# Altium PCB PCB_RX.PcbDoc
Units mm, origin at the board's own origin, x right, y up, seen from the top; angles counter-clockwise.
Board outline 85 x 54.6 mm, 2 copper layers (Top Layer, Bottom Layer); 89 components, 48 nets, 283 pads, 69 vias.
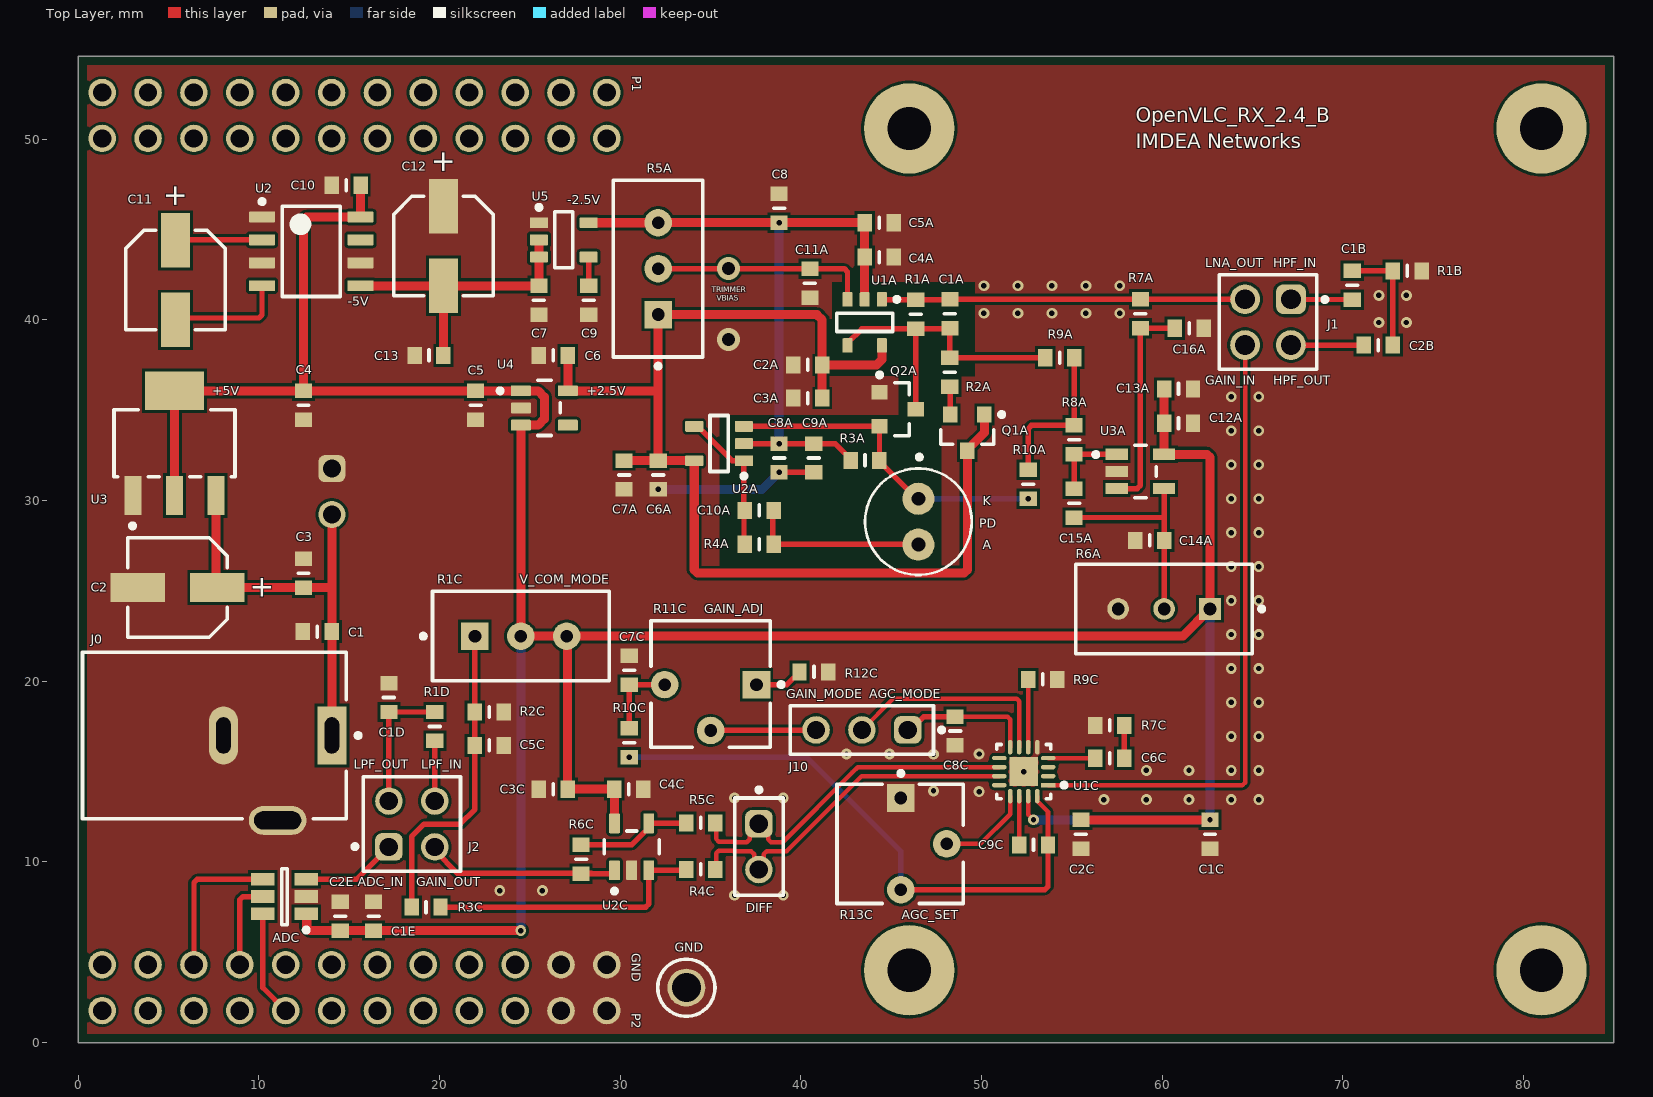
[diagram p0: Top Layer view]
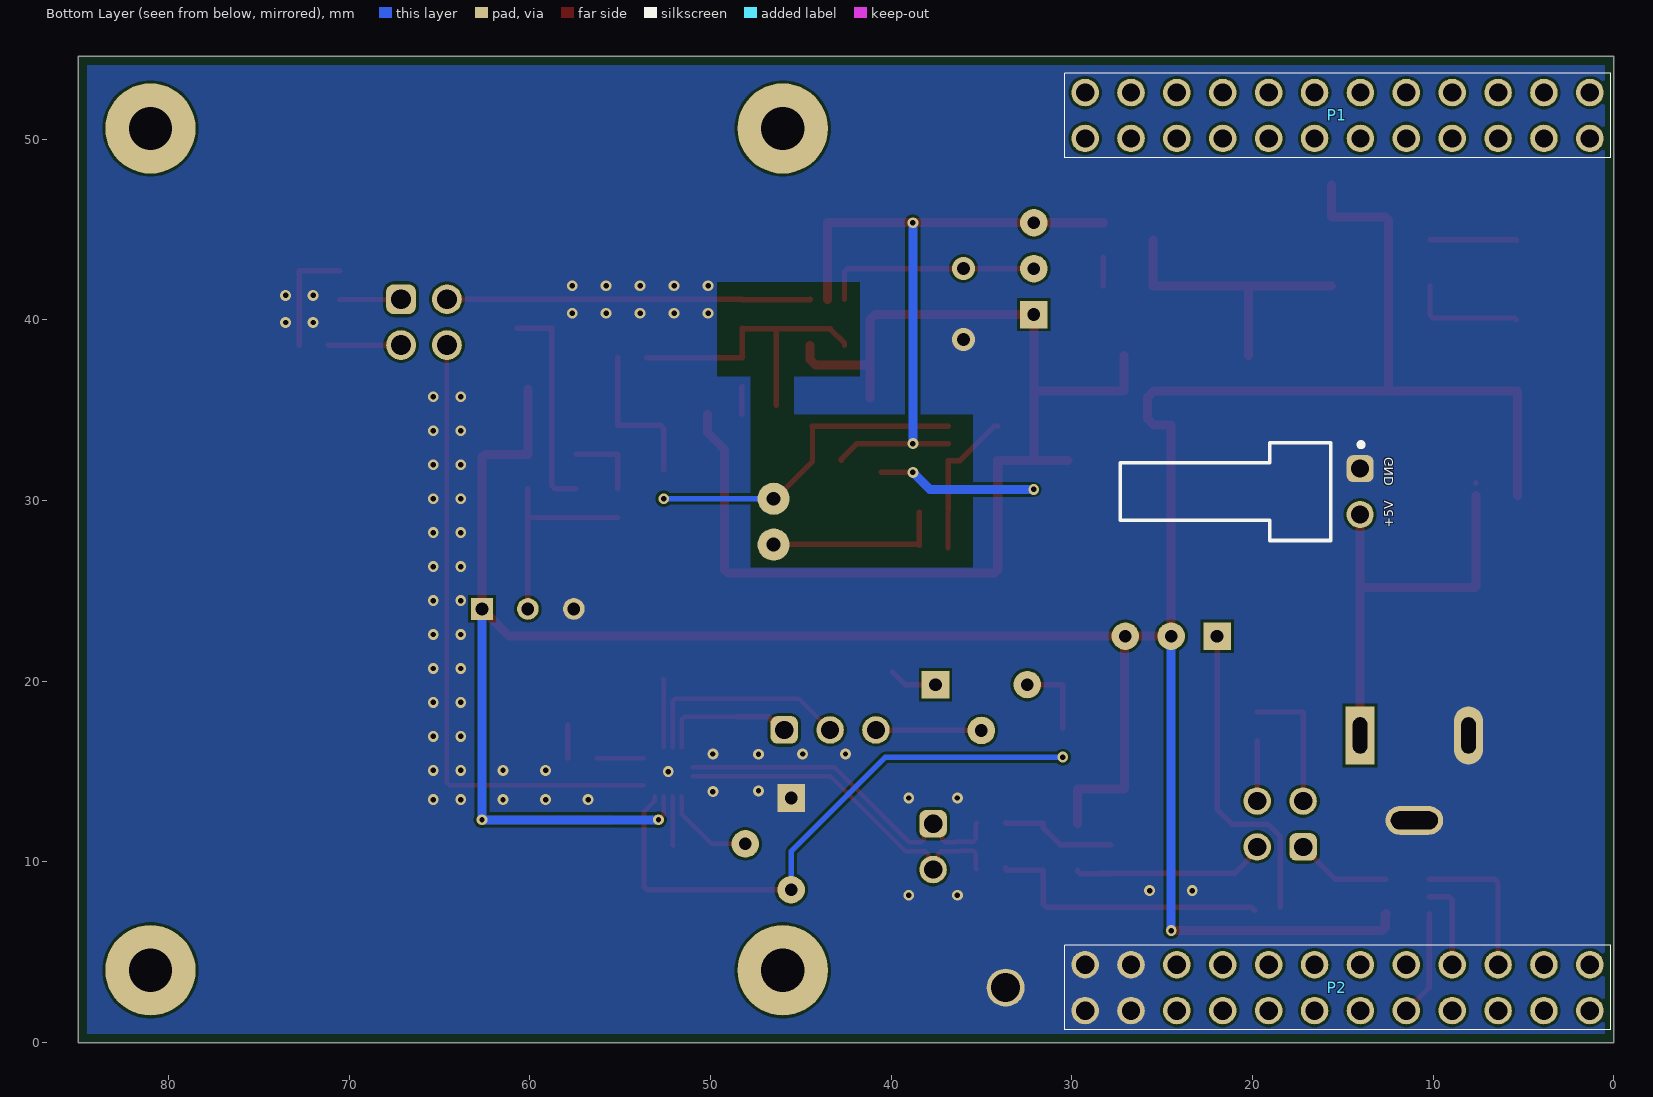
[diagram p1: Bottom Layer view, seen from below]

## Layer stack, top to bottom
Top Solder: solder mask 0.0102, Solder Resist, Dk 3.5
Top Layer: signal copper 0.0356
Dielectric1: dielectric 0.32, FR-4, Dk 4.8
Bottom Layer: signal copper 0.0356
Bottom Solder: solder mask 0.0102, Solder Resist, Dk 3.5

## Board outline
0,0 85,0 85,54.6 0,54.6

## Design rules (kind name [scope] priority, off if disabled: settings)
Clearance Clearance_1 [(InNet('GND') AND InComponent('DC-DC'))] p1: gap=0.5 ignorepadtopadclearanceinfootprint=FALSE except(0: Arc-Hole Track-Hole SMDPad-Hole THPad-Hole Via-Hole Fill-Hole Poly-Hole Region-Hole Text-Hole)
Clearance [All] p2: gap=0.15 ignorepadtopadclearanceinfootprint=FALSE except(0: Arc-Hole Track-Hole SMDPad-Hole THPad-Hole Via-Hole Fill-Hole Poly-Hole Region-Hole Text-Hole)
DiffPairsRouting [All] p1: maxlimit=0.3 minlimit=0.25 mostfreqgap=0.3 toplayer_prefgap=0.25 toplayer_minwidth=0.15 toplayer_maxwidth=0.381 toplayer_prefwidth=0.381 bottomlayer_minwidth=0.15 bottomlayer_maxwidth=0.381 bottomlayer_prefwidth=0.381 maxuncoupledlength=12.7
HoleSize [All] p1: absolutevalues=TRUE maxlimit=2.54 minlimit=0.25 maxpercent=80.000 minpercent=20.000
MinimumSolderMaskSliver [All] p1: minsoldermaskwidth=0.15
PlaneConnect [All] p1: planeconnectstyle=Direct reliefexpansion=0.508 reliefentries=4 reliefconductorwidth=0.254 reliefairgap=0.254
PolygonConnect PolygonConnect_1 [IsVia & InNet('GND')] p1: connectstyle=Direct reliefconductorwidth=0.254 reliefentries=4 polygonreliefangle="90 Angle" airgapwidth=0
PolygonConnect [All] p2: connectstyle=Direct reliefconductorwidth=0.254 reliefentries=4 polygonreliefangle="90 Angle" airgapwidth=0.254
RoutingVias [All] p1: holewidth=0.711 width=1.27 viastyle="Through Hole" minholewidth=25 minwidth=0.55 maxholewidth=0.711 maxwidth=1.27
SMDNeckDown [All] p1: percent=80.000
SilkToSilkClearance [All] p1: silktosilkclearance=0.15
SilkToSolderMaskClearance [IsPad] p1: minsilkscreentomaskgap=0.15 clearancetoexposedcopper=TRUE
SolderMaskExpansion [All] p1: expansion=0.102 istentingtop=FALSE
SupplyNets "Schematic Supply Nets_6" [InNet('-5V')] p1: voltage=0.000
SupplyNets "Schematic Supply Nets_5" [InNet('-2.5V')] p2: voltage=0.000
SupplyNets "Schematic Supply Nets_4" [InNet('+2.5V')] p3: voltage=0.000
SupplyNets "Schematic Supply Nets_3" [InNet('+5V')] p4: voltage=0.000
SupplyNets "Schematic Supply Nets_1" [InNet('VCC')] p5: voltage=0.000
SupplyNets "Schematic Supply Nets" [InNet('GND')] p6: voltage=0.000
Width [All] p1: maxlimit=1 minlimit=0.15 preferedwidth=0.3 minimp=50.000000 maximp=50.000000 favimp=50.000000
24 further rules are at their usual default settings.

## Classes and differential pairs
differential pair OUT: +OUT_P -OUT_N

## Components (designator, comment, footprint, x,y, rotation, side; value= is the part's Value field where it differs from the comment)
+5V "61900211021" 61900211021 -1248.51,-1239.5 r270 bottom (schematic designator 5V)
ADC "ADS7886SBDBVR" TI-DBV6_M 11.42,8.083 r180 top
C1 "Cap" RESC1608X55N 13.24,22.752 r180 top value=22uF
C1A "Cap" RESC1608X55N 48.25,40.34 r90 top value=0.2pF
C1B "Cap" RESC1608X55N 70.524,41.918 r90 top value=120nF
C1C "Cap" RESC1608X55N 62.648,11.533 r270 top value=100nF
C1D "Cap" RESC1608X55N 17.198,19.1 r90 top value=620pF
C1E "Cap" RESC1608X55N 16.354,7.003 r90 top value=1uF
C2 "47uF" WCAP-PSLP_D5H5.5 5.5,25.187 r0 top
C2A "Cap" RESC1608X55N 40.383,37.512 r180 top value=100nF
C2B "Cap" RESC1608X55N 71.962,38.61 r180 top value=120nF
C2C "Cap" RESC1608X55N 55.5,11.533 r270 top value=2.2uF
C2E "Cap" RESC1608X55N 14.509,7.003 r90 top value=10nF
C3 "Cap" RESC1608X55N 12.47,25.987 r270 top value=2.2uF
C3A "Cap" RESC1608X55N 40.383,35.674 r180 top value=2.2uF
C3C "Cap" RESC1608X55N 26.305,14.026 r180 top value=100nF
C4 "Cap" RESC1608X55N 12.47,35.279 r90 top value=22uF
C4A "Cap" RESC1608X55N 44.335,43.482 r0 top value=100nF
C4C "Cap" RESC1608X55N 30.48,14.026 r0 top value=2.2uF
C5 "Cap" RESC1608X55N 22,35.279 r90 top value=2.2uF
C5A "Cap" RESC1608X55N 44.335,45.383 r0 top value=2.2uF
C5C "Cap" RESC1608X55N 22.76,16.448 r180 top value=1uF
C6 "Cap" RESC1608X55N 26.305,38.041 r0 top value=22uF
C6A "Cap" RESC1608X55N 32.103,31.419 r270 top value=100nF
C6C "Cap" RESC1608X55N 57.102,15.739 r180 top value=120nF
C7 "Cap" RESC1608X55N 25.505,41.092 r90 top value=2.2uF
C7A "Cap" RESC1608X55N 30.213,31.419 r270 top value=2.2uF
C7C "Cap" RESC1608X55N 30.5,20.617 r270 top value=2.2uF
C8 "Cap" RESC1608X55N 38.8,46.183 r270 top value=22uF
C8A "Cap" RESC1608X55N 38.8,32.359 r270 top value=100nF
C8C "Cap" RESC1608X55N 48.538,17.248 r90 top value=2.2uF
C9 "Cap" RESC1608X55N 28.26,41.092 r90 top value=10nF
C9A "Cap" RESC1608X55N 40.715,32.359 r270 top value=2.2uF
C9C "Cap" RESC1608X55N 52.882,10.939 r180 top value=2.2uF
C10 "Cap" RESC1608X55N 14.827,47.46 r0 top value=2.2uF
C10A "Cap" RESC1608X55N 37.704,29.461 r180 top value=1uF
C11 "47uF" WCAP-PSLP_D5H5.5 5.385,42.208 r90 top
C11A "Cap" RESC1608X55N 40.5,42.042 r90 top value=1uF
C12 "47uF" WCAP-PSLP_D5H5.5 20.217,44.092 r90 top
C12A "Cap" RESC1608X55N 60.908,34.287 r0 top value=100nF
C13 "Cap" RESC1608X55N 19.417,38.041 r0 top value=22uF
C13A "Cap" RESC1608X55N 60.908,36.187 r0 top value=2.2uF
C14A "Cap" RESC1608X55N 59.308,27.8 r0 top value=1uF
C15A "Cap" RESC1608X55N 55.126,29.864 r270 top value=220pF
C16A "Cap" RESC1608X55N 61.503,39.541 r0 top value=220pF
DIFF "61300211121" 61300211121 37.679,10.849 r270 top
GND "5011" KSTN-5011_V 33.662,3.041 r0 top
J0 "PJ-102A" FP-PJ-102A-MFG 7.54,17 r90 top
J1 "61300421121" 61300421121#1 65.86,39.88 r180 top
J2 "61300421121" 61300421121#2 18.468,12.1 r0 top
J10 "61300311121" 61300311121 43.382,17.306 r180 top
P1 "61302421121" BBB_CAPE_NO_HEADER_R_24 57.204,50.049 r0 bottom
P2 "61302421121" BBB_CAPE_NO_HEADER_R_24 57.205,1.771 r0 bottom
PD "SFH213" FP-SFH213-0 46.507,28.835 r270 top
Q1A "NESG340033" ONSC-SOT-23-3-318-08_V 49.214,33.766 r270 top
Q2A "NESG340033" ONSC-SOT-23-3-318-08_V 45.361,35.059 r0 top
R1A "Res1" RESC1608X55N 46.361,40.307 r270 top value=390k
R1B "Res1" RESC1608X55N 73.562,42.718 r0 top value=130
R1C "500" FP-3296W-MFG#1 24.5,22.5 r270 top
R1D "Res1" RESC1608X55N 19.738,17.5 r270 top value=130
R2A "Res1" RESC1608X55N 48.246,37.108 r270 top value=2M
R2C "Res1" RESC1608X55N 22.76,18.3 r0 top value=100
R3A "Res1" RESC1608X55N 43.552,32.228 r0 top value=2M
R3C "Res1" RESC1608X55N 19.254,7.5 r180 top value=130
R4A "Res1" RESC1608X55N 37.704,27.589 r0 top value=20k
R4C "Res1" RESC1608X55N 34.462,9.587 r0 top value=130
R5A "10k" FP-3296W-MFG#1 32.098,42.842 r0 top
R5C "Res1" RESC1608X55N 34.462,12.163 r0 top value=130
R6A "10k" FP-3296W-MFG#2 60.108,24 r90 top
R6C "Res1" RESC1608X55N 27.838,10.155 r90 top value=130
R7A "Res1" RESC1608X55N 58.798,40.345 r270 top value=68.1
R7C "Res1" RESC1608X55N 57.102,17.555 r180 top value=130
R8A "Res1" RESC1608X55N 55.126,33.364 r270 top value=20k
R9A "Res1" RESC1608X55N 54.326,37.913 r0 top value=0
R9C "Res1" RESC1608X55N 53.389,20.1 r180 top value=10k
R10A "Res1" RESC1608X55N 52.589,30.905 r270 top value=0
R10C "Res1" RESC1608X55N 30.5,16.6 r90 top value=4.02k
R11C "10k" BOUR-3362P 35.005,19.852 r180 top
R12C "Res1" RESC1608X55N 40.727,20.519 r180 top value=1k
R13C "10k" BOUR-3362P 45.5,11 r270 top
U1A "LMH6629MFE/NOPB" DBV0005A_L 43.535,39.865 r270 top
U1C "AD8338ACPZ-R7" FP-CP-16-22-IPC_C 52.339,14.999 r180 top
U2 "LM2663M/NOPB" D0008A_N 12.9,43.797 r0 top
U2A "OPA820IDBVR" DBV0005A_N 35.475,33.159 r180 top
U2C "OPA863ADBVR" FP-DBV0005A-MFG 30.635,10.837 r90 top
U3 "TLV76150DCYR" FP-DCY0004A-MFG 5.332,33.179 r90 top
U3A "LT6015IS5#TRMPBF" FP-S5-5-05-08-1635-MFG 58.798,31.614 r0 top
U4 "TPS7A2425DBVR" FP-DBV0005A-MFG 25.805,35.129 r0 top
U5 "TPS72325DBVR" DBV0005A_N 26.88,44.432 r0 top

## Footprints (in the part's own frame and the unit in brackets; to place one, negate y for a bottom-side part, rotate by r counter-clockwise, add the part's x,y. Pads: shape width x height; smd on the part's side, far side on the other; paste and mask are expansions set on the pad)
61300211121 [mil] "Pin Header, pitch 2.54 mm, THT, Vertical, single row, 2p"
  rrect50% 60x60 hole 40: 1(-50,0)
  round 60 hole 40: 2(50,0)
  silkscreen extent -129,-53 106,53, body extent -100,-50 100,50, height 337
61300311121 [mil] "Pin Header, pitch 2.54 mm, THT, Vertical, single row, 3p"
  rrect50% 60x60 hole 40: 1(-100,0)
  round 60 hole 40: 2(0,0) 3(100,0)
  silkscreen extent -179,-53 156,53, body extent -150,-50 150,50, height 337
61300421121#1 [mm] "Pin Header, pitch 2.54 mm, THT, Vertical, dual row, 4p"
  rrect50% 1.65x1.65 hole 1.1: 1(-1.27,-1.27)
  round 1.65 hole 1.1: 2(-1.27,1.27) 3(1.27,-1.27) 4(1.27,1.27)
  silkscreen extent -3.27,-2.62 2.69,2.62, body extent -2.54,-2.54 2.54,2.54, height 8.59
61300421121#2 [mm] "Pin Header, pitch 2.54 mm, THT, Vertical, dual row, 4p"
  rrect50% 1.524x1.524 hole 1.016: 1(-1.27,-1.27)
  round 1.524 hole 1.016: 2(-1.27,1.27) 3(1.27,-1.27) 4(1.27,1.27)
  silkscreen extent -3.27,-2.62 2.69,2.62, body extent -2.54,-2.54 2.54,2.54, height 8.59
61900211021 [mm] "2.54mm Male Left Angled Header Bottom Locking, 2p"
  rrect50% 1.5x1.5 hole 1: 1(-1271.27,-1262.55)
  round 1.5 hole 1: 2(-1268.73,-1262.55)
  silkscreen extent -1272.72,-1275.82 -1267.29,-1262.38, body extent -1272.54,-1275.75 -1267.46,-1262.23, height 5.83
BBB_CAPE_NO_HEADER_R_24 [mil] "46-pin male header for BeagleBone Black P8,P9"
  round 60 hole 40: 23(-1100,0) 24(-1100,-100) 25(-1200,0) 26(-1200,-100) 27(-1300,0) 28(-1300,-100) 29(-1400,0) 30(-1400,-100) 31(-1500,0) 32(-1500,-100) 33(-1600,0) 34(-1600,-100) 35(-1700,0) 36(-1700,-100) 37(-1800,0) 38(-1800,-100) 39(-1900,0) 40(-1900,-100) 41(-2000,0) 42(-2000,-100) 43(-2100,0) 44(-2100,-100) 45(-2200,0) 46(-2200,-100)
  silkscreen extent -2246,-142 -1056,42
BOUR-3362P [mm] "THD, 3-Leads, Body 6.6x6.99mm, Pitch 2.54mm"
  rect 1.524x1.524 hole 0.7 paste-2539.97 mask+0: 1(-2.54,0.035)
  round 1.524 hole 0.7 paste-2539.97 mask+0: 2(0,2.575) 3(2.54,0.035)
  silkscreen extent -4.03,-3.49 3.3,3.5, body extent -3.3,-3.49 3.3,3.49, height 4.95
D0008A_N [mm] "SOIC, 8-Leads, Body 5x4mm, Pitch 1.27mm, IPC Medium Density"
  rrect17% 1.45x0.6 smd: 1(-2.725,1.905) 2(-2.725,0.635) 3(-2.725,-0.635) 4(-2.725,-1.905) 5(2.725,-1.905) 6(2.725,-0.635) 7(2.725,0.635) 8(2.725,1.905)
  silkscreen extent -2.85,-2.5 1.6,2.88, body extent -3,-2.45 3,2.45, height 1.63
DBV0005A_L [mm] "SOT23, 5-Leads, Body 3.05x1.75mm, Pitch 0.95mm, IPC High Density"
  rrect18% 0.8x0.55 smd: 1(-1.275,0.95) 2(-1.275,0) 3(-1.275,-0.95) 4(1.275,-0.95) 5(1.275,0.95)
  silkscreen extent -1.4,-1.55 0.5,1.9, body extent -1.42,-1.46 1.42,1.46, height 1.08
DBV0005A_N [mm] "SOT23, 5-Leads, Body 3.05x1.75mm, Pitch 0.95mm, IPC Medium Density"
  rrect17% 1x0.6 smd: 1(-1.375,0.95) 2(-1.375,0) 3(-1.375,-0.95) 4(1.375,-0.95) 5(1.375,0.95)
  silkscreen extent -1.5,-1.55 0.5,1.92, body extent -1.42,-1.46 1.42,1.46, height 1.08
FP-3296W-MFG#1 [mm]
  rect 1.524x1.524 hole 0.7 paste-2539.97 mask+0: 1(0.005,-2.54)
  round 1.524 hole 0.7 paste-2539.97 mask+0: 2(0.005,0) 3(0.005,2.54)
  silkscreen extent -2.48,-5.52 2.48,4.89, body extent -2.58,-4.99 2.58,4.99, height 0.25
FP-3296W-MFG#2 [mm]
  rect 1.2x1.2 hole 0.7 paste-2539.97 mask+0: 1(0.005,-2.54)
  round 1.2 hole 0.7 paste-2539.97 mask+0: 2(0.005,0) 3(0.005,2.54)
  silkscreen extent -2.48,-5.53 2.48,4.89, body extent -2.58,-4.99 2.58,4.99, height 0.25
FP-CP-16-22-IPC_C [mm]
  rect 0.806x0.239 smd paste+0 mask+0: 1(-1.353,0.75)
  rrect100% 0.806x0.239 smd paste+0 mask+0: 2(-1.353,0.25) 3(-1.353,-0.25) 4(-1.353,-0.75) 9(1.353,-0.75) 10(1.353,-0.25) 11(1.353,0.25) 12(1.353,0.75)
  rrect100% 0.239x0.806 smd paste+0 mask+0: 5(-0.75,-1.353) 6(-0.25,-1.353) 7(0.25,-1.353) 8(0.75,-1.353) 13(0.75,1.353) 14(0.25,1.353) 15(-0.25,1.353) 16(-0.75,1.353)
  rect 1.6x1.6 smd paste-1000 mask+0: 17(0,0)
  silkscreen extent -2.36,-1.5 1.5,1.5, body extent -1.86,-1.86 1.86,1.86, height 0.25
FP-DBV0005A-MFG [mm]
  rrect17% 1.1x0.6 smd paste+0 mask+0: 1(-1.3,0.95) 2(-1.3,0) 3(-1.3,-0.95) 4(1.3,-0.95) 5(1.3,0.95)
  silkscreen extent -2.57,-1.53 0.87,1.53, body extent -1.95,-1.78 1.95,1.78, height 0.25
FP-DCY0004A-MFG [mm]
  rect 2.15x0.95 smd paste+0 mask+0: 1(-2.9,2.3) 2(-2.9,0) 3(-2.9,-2.3)
  rect 2.15x3.25 smd paste+0 mask+0: 4(2.9,0)
  silkscreen extent -4.7,-3.35 1.85,3.35, body extent -4.08,-3.45 4.08,3.45, height 0.25
FP-PJ-102A-MFG [mm]
  rect 3.2x1.6 hole 0.8 slot 2 at 0 deg paste-2539.97 mask+0: 1(0,-6.5)
  rrect100% 3.2x1.6 hole 0.8 slot 2 at 0 deg paste-2539.97 mask+0: 2(0,-0.5)
  rrect100% 1.6x3.2 hole 2.6 slot 1 at 0 deg paste-2539.97 mask+0: 3(-4.7,-3.5)
  silkscreen extent -4.6,-8.08 4.6,7.3, body extent -5.6,-7.4 4.7,7.4, height 0.25
FP-S5-5-05-08-1635-MFG [mm]
  rect 1.22x0.62 smd paste+0 mask+0: 1(-1.31,0.95) 2(-1.31,0) 3(-1.31,-0.95) 4(1.31,-0.95) 5(1.31,0.95)
  silkscreen extent -2.6,-1.45 0.87,1.45, body extent -2.02,-1.68 2.02,1.68, height 0.25
FP-SFH213-0 [mil]
  round 70 hole 30 paste-99999 mask+0: 1(-50,0) 2(50,0)
  silkscreen extent -146,-116 116,116, body extent -120,-120 120,120, height 10
KSTN-5011_V [mm] "Test Point, Dia 3.17mm"
  round 2.1 hole 1.6: 1(0,0)
  silkscreen extent -1.59,-1.58 1.59,1.58, body extent -1.59,-1.59 1.59,1.59, height 8.13
ONSC-SOT-23-3-318-08_V [mm] "SOT23, 3-Leads, Body 2.92x1.3mm, Pitch 0.95mm"
  rect 0.9x0.8 smd: 1(-1,0.95) 2(-1,-0.95) 3(1,0)
  silkscreen extent -1.12,-1.46 0.65,2.03, body extent -0.65,-1.46 0.65,1.46, height 1.11
RESC1608X55N [mm]
  rect 0.8x0.95 smd: 1(-0.8,0) 2(0.8,0)
  silkscreen extent 0,-0.3 0,0.3
TI-DBV6_M [mm] "SOT23, 6-Leads, Body 2.9x1.6mm, Pitch 0.95mm, IPC Low Density"
  rect 1.3x0.7 smd: 1(-1.2,0.95) 2(-1.2,0) 3(-1.2,-0.95) 4(1.2,-0.95) 5(1.2,0) 6(1.2,0.95)
  silkscreen extent -1.33,-1.55 0.15,1.97, body extent -0.87,-1.52 0.87,1.53, height 1.45
WCAP-PSLP_D5H5.5 [mm] "Aluminum Polymer Capacitors, body diameter 5mm"
  rect 3x1.6 smd: 1(2.2,0) 2(-2.2,0)
  silkscreen extent -2.75,-2.75 2.75,2.75, body extent -3,-2.65 3,2.65, height 5.5

## Part data
+5V: library part CMP-1502-00592-2, Color=Beige, Contact Resistance=20mΩ, Current Rating=3A, Flammability Rating="UL94 V-0", Insulation Resistance=1GΩ, Max Operating Temperature=105°C, Min Operating Temperature=-40°C, Operating Supply Voltage=250V, Connector Type="Male Pin", Contact Gender=Male, Contact Material=Copper, Contact Mating Length=7.62mm, Contact Plating=Tin, Fastening Type=Friction, Gender=Male, Height=3.2mm, Housing Material=Nylon, Insulation=Insulated, Lead Pitch=2.54mm, Length=5.08mm, Mount="Through Hole", NexarPartId=18818217, Number of Contacts=2, Number of Pins=2, Number of Positions=2, Number of Rows=1, Packaging=Bulk, Pitch=2.54mm, REACH SVHC=Unknown, RoHS=Compliant, Termination="Through Hole", Voltage Rating=250V, Width=5.12mm
ADC: library part CMP-0003-00246-2, "2.35 to 5.25 V, 12-Bit, 1 MSPS, Serial ADC, -40 to 125 degC, 6-pin SOT23 (DBV6), Green (RoHS & no Sb/Br)", Analog Voltage AV/DD(Max)(V)=5.25, Analog Voltage AV/DD(Min)(V)=2.35, Manufacturer="Texas Instruments", # Input Channels=1, Architecture=SAR, Code_JEDEC=MO-178, ComponentLink1Description="Manufacturer URL", ComponentLink1URL=http://www.ti.com/, ComponentLink2Description=Datasheet, ComponentLink2URL=http://www.ti.com/general/docs/lit/getliterature.tsp?genericPartNumber=ADS7886&fileType=pdf, ComponentLink3Description="Package Specification", ComponentLink3URL=http://www.ti.com/litv/pdf/mpds026h, DatasheetVersion=SLAS492A, Digital Supply(Max)(V)=5.25, Digital Supply(Min)(V)=2.35, Eco-Plan="Green (RoHS & no Sb/Br)", INL(Max)(+/-LSB)=1.25, Interface="Serial SPI", Mounting Technology="Surface Mount", PackageDescription="6-Pin Plastic Small Outline, Body 1.6 x 2.9 mm, Pitch 0.95 mm", PackageReference=DBV6, PackageVersion="4073253-5/K, 03/2006", PartNumber=ADS7886SBDBVR, Resolution(Bits)=12, Sample Rate (max)(SPS)=1M, SFDR(dB)=85.5, SINAD(dB)=71.25, SNR(dB)=71.25, SubFamily="Precision ADC (<=10MSPS)"
C1 C1A C1B C1C C1D C1E C2A C2B C2C C2E C3 C3A C3C C4 C4A C4C C5 C5A C5C C6 C6A C6C C7 C7A C7C C8 C8A C8C C9 C9A C9C C10 C10A C11A C12A C13 C13A C14A C15A C16A: "Capacitor", LatestRevisionDate=17-Jul-2002, LatestRevisionNote="Re-released for DXP Platform.", PackageDescription="Radial Cap, Thru-Hole; 2 Leads; 0.3 in Pin Spacing", PackageReference=RAD-0.3, Published=8-Jun-2000, Publisher="Altium Limited"
C2 C11 C12: library part CMP-03913-53758736-1, "875105242006 WCAP-PSLP Aluminum Polymer Capacitors", Capacitance=47µF, Case/Package=Radial, ESR (Equivalent Series Resistance)=30mΩ, Leakage Current=300µA, Max Operating Temperature=105°C, Min Operating Temperature=-55°C, Ripple Current=1.97A, Tolerance=20%, Voltage Rating=10V, Diameter=5mm, Height - Seated (Max)=5.5118mm, Length=5.5mm, Life (Hours)=2000hours, Mount="Surface Mount", NexarPartId=53758736, Packaging="Tape & Reel (TR)", Pitch=5.3mm, Polarity=Polar, REACH SVHC=Unknown, RoHS=Compliant, Voltage Rating (DC)=10V
DIFF: library part CMP-1712-00002-6, Color=Black, Contact Resistance=20mΩ, Current Rating=3A, Max Operating Temperature=125°C, Min Operating Temperature=-40°C, Operating Supply Voltage=250V, Connector Type="Male Pin", Contact Gender=Male, Contact Material=Copper, Contact Mating Length=5.9944mm, Contact Plating=Gold, Gender=Male, Height=8.94mm, Housing Material=PBT, Lead Free="Lead Free", Lead Pitch=2.54mm, Mount="Through Hole", NexarPartId=20081794, Number of Contacts=2, Number of Pins=2, Number of Positions=2, Number of Rows=1, Orientation=Vertical, Packaging=Bulk, Pitch=2.54mm, REACH SVHC="No SVHC", RoHS=Compliant, Termination="Through Hole", Voltage Rating=250V
GND: library part CMP-1672-00003-4, "Test Point, Black, Through Hole, RoHS, Bulk", Colour=Black, Manufacturer=Keystone, Package Quantity=100, ComponentLink1Description="Manufacturer URL", ComponentLink1URL=http://www.keyelco.com/, ComponentLink2Description=Datasheet, ComponentLink2URL=http://www.keyelco.com/product-pdf.cfm?p=1320, Contact Material=Bronze, Contact Plating=Silver, DatasheetVersion="Rev. F, 12/2013", Height="8.12 mm", Mount="Through Hole", Mounting Technology="Through Hole", PackageDescription="1-Pin Through Hole Device, Dia 3.17 mm", PackageReference=5011, Packaging=Bulk, Pins=1, REACH SVHC="No SVHC", RoHSCompliant=true
J0: library part CMP-12637-106234071-1, "PJ-102A 2.0 x 6.5 mm, 2.5 A, Horizontal, Through Hole, Tapered Pins, Dc Power Jack Connector", Color=Black, Current Rating=2.5A, Flammability Rating="UL94 V-0", Insulation Resistance=50MΩ, Max Operating Temperature=85°C, Min Operating Temperature=-25°C, Voltage Rating=24V, Contact Gender=Male, Contact Material="Copper, Nickel, Tin", Contact Plating=Nickel, Diameter=2.1mm, Gender=Male, Height=11.2mm, Housing Color=Black, Housing Material=Thermoplastic, Inside Diameter=2mm, Lead Free="Lead Free", Lifecycle Status=Production, Mount="Through Hole", NexarPartId=106234071, Number of Conductors=2, Number of Contacts=3, Orientation=Horizontal, Outside Diameter=6.5mm, Packaging=Bulk, RoHS=Compliant, Schedule B="8536695050, 8536695050", Shielding=No, Termination="Through Hole", Voltage Rating (DC)=24V
J1 J2: library part CMP-1502-01066-4, Color=Black, Contact Resistance=20mΩ, Current Rating=3A, Max Operating Temperature=105°C, Min Operating Temperature=-40°C, Operating Supply Voltage=250V, Connector Type="Male Pin", Contact Material=Copper, Contact Mating Length=5.9944mm, Contact Plating=Gold, Gender=Male, Height=8.89mm, Lead Free="Lead Free", Lead Pitch=2.54mm, Mount="Through Hole", NexarPartId=32855524, Number of Contacts=4, Number of Pins=4, Number of Positions=4, Number of Rows=2, Orientation=Vertical, Packaging=Bulk, Pitch=2.54mm, REACH SVHC=Unknown, RoHS=Compliant, Row Spacing=2.54mm, Termination=Solder, Voltage Rating=250V
J10: library part CMP-1502-01062-3, Color=Black, Contact Resistance=20mΩ, Current Rating=3A, Max Operating Temperature=105°C, Min Operating Temperature=-40°C, Operating Supply Voltage=250V, Connector Type="Male Pin", Contact Material=Copper, Contact Mating Length=5.9944mm, Contact Plating=Gold, Gender=Male, Height=8.94mm, Lead Free="Lead Free", Lead Pitch=2.54mm, Mount="Through Hole", NexarPartId=32855521, Number of Contacts=3, Number of Pins=3, Number of Positions=3, Number of Rows=1, Orientation=Vertical, Packaging=Bulk, Pitch=2.54mm, REACH SVHC=Unknown, RoHS=Compliant, Termination=Solder, Voltage Rating=250V
P1: library part BBB_P8_reduced
P2: library part BBB_P9_reduced
PD: library part CMP-62027-000002-1, "SENSOR PHOTODIODE 850NM RADIAL", Dark Current=0.001uA, Forward Current=100mA, Forward Voltage=1.3V, Manufacturer=OSRAM, Power Dissipation=150mW, Reverse Breakdown Voltage=20V, Temperature="-40°C to +100°C", Temperature Range High=+100°C, Temperature Range Low=-40°C, Voltage=50V, Automotive=No, Category=Diode, ComponentLink2Description=Datasheet, ComponentLink2URL=https://dammedia.osram.info/media/resource/hires/osram-dam-5488355/SFH%20213_EN.pdf, Device Class L1=Sensors, Device Class L2="Optical Sensors", Device Class L3=Photodiodes, Digikey Description="SENSOR PHOTODIODE 850NM RADIAL", Ipc Land Pattern Name=CAPRD254W95D570H860, Lead Free=Yes, Manufacturer Part Number=SFH213, Mouser Description="Photodiode PIN Chip 850nm 0.62A/W Sensitivity 2-Pin T-1 3/4 T/R", Octopart=https://octopart.com/sfh+213-osram+opto-55410864, Package=SFH213, RoHS=TRUE, Sensor Output=Photodiode, Wavelength=400-1100nm
Q1A Q2A: library part CMP-0722-00001-2, "General Purpose Transistor, NPN Silicon, 3-Pin SOT-23, Pb-Free, Tape and Reel", Manufacturer="On Semiconductor", PartNumber=MMBT2222LT1G, ComponentLink1Description="Manufacturer URL", ComponentLink1URL=http://www.onsemi.com/, ComponentLink2Description=Datasheet, ComponentLink2URL=http://www.onsemi.cn/pub_link/Collateral/MMBT2222LT1-D.PDF, ComponentLink3Description="Package Specification", ComponentLink3URL=http://www.onsemi.cn/pub_link/Collateral/318-08.PDF, DatasheetVersion="Rev. 10", fT Min (MHz)=250, IC Continuous (A)=0.6, Mounting Technology="Surface Mount", PackageDescription="3-Pin Small Outline Transistor, Body 2.92 x 1.3 mm, Pitch 0.95 mm", PackageReference=SOT-23-3-318-08, PackageVersion="Rev. AP, 11/2009", Packing="Tape and Reel", Polarity=NPN, RoHS=TRUE
R1A R1B R1D R2A R2C R3A R3C R4A R4C R5C R6C R7A R7C R8A R9A R9C R10A R10C R12C: "Resistor", LatestRevisionDate=17-Jul-2002, LatestRevisionNote="Re-released for DXP Platform.", PackageDescription="Axial Device, Thru-Hole; 2 Leads; 0.3 in Pin Spacing", PackageReference=AXIAL-0.3, Published=8-Jun-2000, Publisher="Altium Limited"
R1C R5A R6A: library part CMP-1747-00001-8, "TRIMMER 10K OHM 0.5W PC PIN TOP", Color=Blue, Insulation Resistance=1GR, Max Operating Temperature=125°C, Max Power Dissipation=500mW, Min Operating Temperature=-55°C, Package Quantity=50, Resistance=10kR, Resistance Tolerance=10%, Resistor Type=Cermet, Temperature Coefficient=100ppm/°C, Contact Plating=Tin, Depth=4.83mm, Height=11.55mm, Lead Free="Lead Free", Length=9.53mm, Military Standard=Not, Mount="Through Hole", Number of Turns=25, Packaging=Rail/Tube, Power Rating=500mW, Radiation Hardening=No, Reach SVHC Compliant=Yes, RoHS Compliant=Yes, Series=3296, Taper=Linear, Technology=CERMET, Termination=Pin, Tolerance=10%, Weight=0.03oz, Width=9.53mm
R11C R13C: library part CMP-1747-00004-1, "Square Trimpot(R) Trimming Potentiometer, 10 KOhm, 300 V, -55 to 125 degC, 3-Pin THD, RoHS, Tube", Case Code (Imperial)=0612, Case Code (Metric)=1632, Case/Package=1206, Max Operating Temperature=125degC, Min Operating Temperature=-25degC, Package Quantity=5000, Power Rating="1 W", Resistance="50 mohm", Tolerance=1%, Voltage Rating="220 mV", ComponentLink1Description="Manufacturer URL", ComponentLink1URL=http://www.bourns.com/, ComponentLink2Description=Datasheet, ComponentLink2URL=http://www.bourns.com/docs/Product-Datasheets/3362.pdf, DatasheetVersion=May-16, Height="0.6 mm", Length="3.2 mm", Mount="Surface Mount", PackageDescription="3-Pin Through Hole Device, Body 6.6 x 6.99 mm, Pitch 2.54 mm", PackageReference=3326P, Packaging="Tape and Reel", Pins=2, REACH SVHC="No SVHC", RoHSCompliant=True, Width="1.6 mm"
U1A: library part CMP-0055-01619-3, "Ultra-Low Noise, High-Speed Operational Amplifier with Shutdown, 5-pin SOT-23, 250 Reel", Manufacturer="Texas Instruments", Package Reference=DBV0005A, PackageTopMarking=AE7A*XTT, PowerWise=Y, ComponentLink1Description="Datasheet URL", ComponentLink1URL=http://www.ti.com/general/docs/lit/getliterature.tsp?genericPartNumber=LMH6629&fileType=pdf, CompType=Amplifiers, High-Reliability=Y, PackageDescription="Molded SOT-23, .115 x .063 x .040 in Body, 5 Lead, .0375 in Pitch", PartNumber=LMH6629MFE/NOPB, PinCount=5, RoHS=Y
U1C: library part CMP-09116-000032-1, "IC OPAMP VGA 1 CIRCUIT 16LFCSP", Manufacturer="Analog Devices", Max Junction Temp=+150°C, Max Supply Voltage=5V, Min Supply Voltage=3V, Nominal Supply Current=3-6mA, Output Current per Channel=5mA, Package=CP-16-22, Temperature="-40°C to +85°C", Temperature Range High=+85°C, Temperature Range Low=-40°C, Voltage Gain=80dB, Automotive=No, Bandwidth=18MHz, Category=IC, ComponentLink2Description=Datasheet, ComponentLink2URL=https://www.analog.com/media/en/technical-documentation/data-sheets/AD8338.pdf, Device Class L1="Integrated Circuits (ICs)", Device Class L2="Linear ICs", Device Class L3="Amplifiers - Op Amps", Digikey Description="IC OPAMP VGA 1 CIRCUIT 16LFCSP", Height=0.8mm, Ipc Land Pattern Name=QFN50P300X300X75-16, Lead Free=Yes, Manufacturer Part Number=AD8338ACPZ-R7, Mouser Description="Special Purpose Amplifiers Ultra Low Pwr 18MHz SGL CH VGA", Number of Channels=1, Octopart=https://octopart.com/ad8338acpz-r7-analog+devices-21054770, RoHS=TRUE
U2: library part CMP-0065-00037-3, "Switched Capacitor Voltage Converter, 8-pin Narrow SOIC, Pb-Free", Manufacturer="Texas Instruments", PackageTopMarking=NSZXTT*LM26*63M, PowerWise=N, Code_IPC=SOIC127P600-8, Code_JEDEC=MS-012-AA, ComponentLink1Description="Datasheet URL", ComponentLink1URL=http://www.ti.com/general/docs/lit/getliterature.tsp?genericPartNumber=LM2663&fileType=pdf, CompType="Switch Caps", PackageDescription="SOIC Narrow, 4.9 x 3.9 x 1.45mm, 8 Lead, 1.27mm Pitch", PackageReference=D0008A, PinCount=8, RoHS=Y
U2A: library part CMP-0018-00428-2, "Unity Gain Stable, Low Noise, Voltage Feedback Operational Amplifier, 5 to 12 V, -40 to 85 degC, 5-pin SOT23 (DBV5), Green (RoHS & no Sb/Br)", Manufacturer="Texas Instruments", 2nd Harmonic(dBc)=90, 3rd Harmonic(dBc)=110, @ MHz=1, Acl, min stable gain(V/V)=1, BW @ Acl(MHz)=700, Code_JEDEC=MO-178, ComponentLink1Description="Manufacturer URL", ComponentLink1URL=http://www.ti.com/, ComponentLink2Description=Datasheet, ComponentLink2URL=http://www.ti.com/general/docs/lit/getliterature.tsp?genericPartNumber=OPA820&fileType=pdf, ComponentLink3Description="Package Specification", ComponentLink3URL=http://www.ti.com/litv/pdf/mpds018i, DatasheetVersion=SBOS303C, Diff Gain(%)=0.01, Diff Phase(deg)=0.03, Eco-Plan="Green (RoHS & no Sb/Br)", Iib(Max)(nA)=2300, Io(Typ)(mA)=110, Iq per channel(Max)(mA)=6.4, Mounting Technology="Surface Mount", Number of Channels=1, PackageDescription="5-Pin Plastic Small Outline, Body 1.6 x 2.9 mm, Pitch 0.95 mm", PackageReference=DBV0005A, PackageVersion="4073253-4/K, 03/2006", PartNumber=OPA820IDBVR, Settling Time (0.1%)(Typ)(ns)=26, Slew Rate(Typ)(V/us)=240, Sub Family="High Output Current Amplifier (>=50mA), High Speed Amplifier (>=50MHz)", THD (Fc is 1 MHz)(Typ)(dB)=-85, Vio(Max)(mV)=1, Vn at Flatband(Typ)(nV/rtHz)=2.5, Vs(Max)(V)=12, Vs(Min)(V)=5
U2C: library part CMP-00370-145533195-1, "OPA863ADBVR Single-channel, high-precision, low-power, 105-MHz, 12-V RRIO voltage-feedback amplifier 5-SOT-23 -40 to 125", Ambient Temperature Range High=125°C, Case/Package=SOT-23, Input Bias Current=300nA, Input Offset Voltage (Vos)=10µV, Manufacturer Lifecycle Status=ACTIVE, Max Junction Temperature (Tj)=150°C, Max Supply Voltage=12.6V, Min Operating Temperature=-40°C, Min Supply Voltage=2.7V, Nominal Supply Current=800µA, Output Current per Channel=30mA, Voltage Gain=128dB, Bandwidth=105MHz, Height=1.45mm, Length=2.9mm, Lifecycle Status=Production, Max Operating Temperature=125°C, NexarPartId=145533195, Number of Channels=1, Number of Pins=5, Response Time=70ns, Thickness=1.2mm, Width=1.6mm
U3: library part CMP-00370-134324849-1, "TLV76150DCYR 1-A 16-V high-PSRR linear voltage regulator 4-SOT-223 -40 to 125", Case/Package=SOT-223, Dropout Voltage=900mV, Manufacturer Lifecycle Status=ACTIVE, Max Junction Temperature (Tj)=125°C, Max Supply Voltage=16V, Min Operating Temperature=-40°C, Min Supply Voltage=6.5V, Nominal Supply Current=65µA, Output Current=1A, Output Voltage=5V, Accuracy=1%, Height=1.8mm, Length=6.5mm, Lifecycle Status=Production, Max Operating Temperature=125°C, NexarPartId=134324849, Number of Channels=1, Number of Outputs=1, Number of Pins=4, Thickness=1.6mm, Width=3.5mm
U3A: library part CMP-09116-000024-1, "IC OPAMP GP 1 CIRCUIT TSOT23-5", Input Bias Current=0.002uA, Input Offset Voltage=0.075mV, Manufacturer="Analog Devices", Manufacturer Part Number=LT6015MPS5#TRMPBF, Max Junction Temp=+150°C, Max Supply Voltage=50V, Min Supply Voltage=3V, Nominal Supply Current=315-340uA, Output Current per Channel=32mA, Package=S5-5-05-08-1635, Temperature="-55°C to +150°C", Temperature Range Low=-55°C, Voltage Gain=3000V/mV, Automotive=No, Category=IC, ComponentLink2Description=Datasheet, ComponentLink2URL=https://www.analog.com/media/en/technical-documentation/data-sheets/601567ff.pdf, Device Class L1="Integrated Circuits (ICs)", Device Class L2="Linear ICs", Device Class L3="Amplifiers - Op Amps", Digikey Description="IC OPAMP GP 1 CIRCUIT TSOT23-5", Gain Bandwidth=3.3MHz, Height=1mm, Ipc Land Pattern Name=SOT95P280X100-5, Lead Free=Yes, Mouser Description="LT6015 - 3.2MHz, 0.8V/µs Low Power, Over-The-Top Precision Op Amps", Number of Channels=1, Octopart=https://octopart.com/lt6015mps5%23trmpbf-analog+devices-88316455, RoHS=TRUE, Standoff Height=0.01mm, Temperature Range High=+150°C
U4: library part CMP-00370-106221449-1, "TPS7A2425DBVR 200-mA, 18-V, ultra-low-IQ, low-dropout (LDO) voltage regulator with enable ; 5-SOT-23 -40 to 125", Case/Package=SOT-23, Dropout Voltage=160mV, Manufacturer Lifecycle Status=ACTIVE, Max Junction Temperature (Tj)=125°C, Max Supply Voltage=18V, Min Operating Temperature=-40°C, Min Supply Voltage=3V, Output Current=200mA, Output Voltage=2.5V, Accuracy=1.25%, Height=1.45mm, Length=2.9mm, Lifecycle Status=Production, Max Operating Temperature=125°C, NexarPartId=106221449, Number of Channels=1, Number of Outputs=1, Number of Pins=5, Thickness=1.2mm, Width=1.6mm
U5: library part CMP-0394-00292-2, "Single Output High PSRR LDO, 200 mA, Fixed -2.5 V Output, -10 to -2.7 V Input, 5-pin SOT-23 (DBV), -40 to 125 degC, Green (RoHS & no Sb/Br)", Manufacturer="Texas Instruments", Accuracy(%)=2, Code_JEDEC=MO-178, ComponentLink1Description="Manufacturer URL", ComponentLink1URL=http://www.ti.com/, ComponentLink2Description=Datasheet, ComponentLink2URL=http://www.ti.com/general/docs/lit/getliterature.tsp?genericPartNumber=TPS72325&fileType=pdf, ComponentLink3Description="Package Specification", ComponentLink3URL=http://www.ti.com/litv/pdf/mpds018i, DatasheetVersion=SLVS346B, Eco-Plan="Green (RoHS & no Sb/Br)", Fixed Output Options(V)=-2.5, Iout(Max)(A)=0.2, Iq(Typ)(mA)=0.13, Mounting Technology="Surface Mount", PackageDescription="5-Pin Plastic Small Outline, Body 1.60 Ãƒâ€” 2.90 mm, Pitch 0.95 mm", PackageReference=DBV0005A, PackageVersion=4073253-4/K, PartNumber=TPS72325DBVR, SubFamily="Single Channel LDO", Vdo(Typ)(mV)=280, Vin(Max)(V)=-2.7, Vin(Min)(V)=-10, Vout Adj(Max)(V)=-2.5, Vout Adj(Min)(V)=-2.5

## Free pads (board coordinates)
  round 5 hole 2.4: 3(46,4) 3(46,50.6) 3(81,4) 3(81,50.6)

## Via types
v1: diameter 0.6, hole 0.3, Top Layer to Bottom Layer, 67 vias
v2: diameter 1.27, hole 0.711, Top Layer to Bottom Layer, 2 vias

## Nets (pads, with @x,y where several pads share a name; then routed paths per layer and width w, separated by ;. In a path a pad name is that pad's centre, name@x,y a point inside that pad or via, vN(x,y) a via of type N, cw(c..) or ccw(c..) an arc to the next point about the centre after c; other vN are vias at no path point)
+2.5V: C2A.1 C3A.1 C6.2 C6A.1 C7A.1 Q1A.1 Q1A.3 R5A.1 U1A.5 U2A.5 U4.5 | length 67
  Top Layer w0.5: C6.2 U4.5 31.921,36.079 32.103,36.26 ; C7A.1 C6A.1 ; C3A.1 C2A.1 ; U1A.5 44.485,37.805 44.192,37.512 C2A.1 ; Q1A.3 49.214,26.174 49.039,25.999 34.275,25.999 34.1,26.174 U2A.5 34.095,32.214 32.108,32.214 C6A.1 ; Q1A.3@49.214,32.816 50.164,33.766 Q1A.1 ; C6A.1 32.103,36.26 ; 32.103,36.26 R5A.1 40.89,40.302 41.183,40.009 C2A.1
+5V: ADC.1 C1C.1 C1E.1 C2C.1 C2E.1 C3C.1 C4.2 C4C.1 C5.2 C10.2 C12A.1 C13A.1 R1C.2 R1C.3 R6A.1 U1C.15 U2.8 U2C.5 U3.2 U3.4 U3A.5 U4.1 U4.3 | length 180.5
  Top Layer w0.25: U1C.15 52.589,12.621 v1(52.877,12.333)
  Top Layer w0.5: U3.2 U3.4 C4.2 ; ADC.1 12.651,7.103 12.651,6.379 12.827,6.203 C2E.1 C1E.1 16.357,6.2 24.497,6.2 v1(24.5,6.197) ; C10.2 15.627,45.704 U2.8 12.645,45.702 12.47,45.526 C4.2 ; R1C.2@24.5,22.5 27.04,22.5 61.143,22.5 R6A.1 62.648,32.388 62.472,32.564 U3A.5 C12A.1 C13A.1 ; R1C.2@24.505,22.5 24.505,31.651 U4.3 25.454,34.179 25.805,34.53 25.805,35.727 25.454,36.079 U4.1 C5.2 C4.2 ; R1C.3 27.072,22.463 27.072,14.058 C3C.1 C4C.1 29.683,14.023 29.683,12.14 U2C.5 U2C.5@29.68,12.132 ; C2C.1 v1(62.648,12.333)
  Bottom Layer w0.5: v1(24.5,6.197) R1C.2 ; v1(52.877,12.333) v1(62.648,12.333) R6A.1
-2.5V: C4A.1 C5A.1 C8.2 C8A.1 C9A.1 R3A.1 R5A.3 U1A.2 U2A.2 U5.5 | length 38.1
  Top Layer w0.3: U2A.2 v1(38.8,33.159) C9A.1 41.896,33.159 42.752,32.303 R3A.1
  Top Layer w0.5: U5.5 R5A.3 ; R5A.3 40.496,45.383 ; 40.497,45.383 C5A.1 C4A.1 U1A.2
  Bottom Layer w0.5: v1(38.8,33.159) v1(38.8,45.383)
-5V: C7.2 C12.2 C13.2 U2.5 U5.2 U5.3 | length 16.3
  Top Layer w0.5: U2.5 C12.2 ; C13.2 C12.2 ; U5.2 C7.2 C12.2
ADC_IN: ADC.3 J2.1 | length 5.3
  Top Layer w0.3: ADC.3 15.402,9.033 J2.1
CS_PD: ADC.6 P2.37 | length 5.9
  Top Layer w0.3: ADC.6 10.22,3.036 P2.37
DC_cancel: R8A.1 R9A.2 R10A.1 | length 8.6
  Top Layer w0.3: R10A.1 52.589,33.988 52.765,34.164 R8A.1 R9A.2
DETO: C8C.2 J10.1 U1C.8 | length 7.6
  Top Layer w0.25: J10.1 J10.1@46.071,17.306 ; C8C.2 48.552,18.035 51.443,18.035 51.589,17.888 U1C.8
  Top Layer w0.3: J10.1@46.071,17.306 46.813,18.048 C8C.2
GAIN: J10.2 U1C.7 | length 12
  Top Layer w0.25: J10.2 45.122,19.046 51.943,19.046 52.089,18.899 U1C.7
GAIN_IN: J1.4 U1C.1 | length 35.2
  Top Layer w0.25: U1C.1 64.443,14.249 64.59,14.395 J1.4
GAIN_OUT: J2.3 R6C.1 U2C.1 | length 11.1
  Top Layer w0.3: J2.3@19.738,10.621 20.992,9.367 28.4,9.367 ; R6C.1@27.855,9.355 29.535,9.355 29.685,9.505 U2C.1
GND: +5V.1 ADC.2 C1.2 C1C.2 C1D.2 C1E.2 C2.2 C2A.2 C2C.2 C2E.2 C3.1 C3A.2 C3C.2 C4.1 C4A.2 C4C.2 C5.1 C5A.2 C5C.1 C6.1 C6A.2 C7.1 C7A.2 C7C.1 C8.1 C8A.2 C8C.1 C9.1 C9A.2 C10.1 C11A.1 C12.1 C12A.2 C13.1 C13A.2 C14A.1 C16A.2 GND.1 J0.2 J0.3 P2.23 P2.24 P2.25 P2.26 Q2A.1 R1B.2 R2C.2 R6A.3 R7C.2 R9C.1 R12C.1 R13C.1 U1C.5 U1C.17 U2.1 U2.3 U2.6 U2C.2 U3.1 U3A.2 U4.2 U5.1 | length 8.8
  Top Layer w0.3: v1(38.8,31.559) C9A.2@40.55,31.559
  Bottom Layer w0.5: v1(32.103,30.619) 37.86,30.619 v1(38.8,31.559)
  other v1: 36.334,8.159 39.024,8.159 23.337,8.416 25.692,8.416 56.776,13.449 59.131,13.449 61.485,13.449 63.828,13.449 65.348,13.449 36.336,13.539 39.024,13.539 49.871,13.894 47.342,13.931 52.339,14.999 59.131,15.068 61.485,15.068 63.828,15.068 65.348,15.068 42.527,15.974 44.9,15.974 47.342,15.961 49.871,15.974 63.828,16.948 65.348,16.948 63.828,18.828 65.348,18.828 63.828,20.708 65.348,20.708 63.828,22.588 65.348,22.588 63.828,24.468 65.348,24.468 63.828,26.348 65.348,26.348 63.828,28.228 65.348,28.228 63.828,30.108 65.348,30.108 63.828,31.988 65.348,31.988 63.828,33.868 65.348,33.868 63.828,35.748 65.348,35.753 71.999,39.86 73.519,39.86 50.136,40.375 52.016,40.375 53.896,40.375 55.776,40.375 57.656,40.375 71.999,41.36 73.519,41.36 50.136,41.895 52.016,41.895 53.896,41.895 55.776,41.895 57.656,41.895
  other v2: 36,38.928
HPF_IN: C1B.1 J1.1 | length 3.4
  Top Layer w0.3: J1.1 67.146,41.134 70.508,41.134 C1B.1
HPF_OUT: C2B.2 J1.2 | length 4
  Top Layer w0.3: J1.2 C2B.2
LNA_OUT: C1A.2 J1.3 R1A.1 R7A.1 U1A.1 | length 20.1
  Top Layer w0.3: U1A.1 44.501,41.123 46.345,41.123 R1A.1 46.377,41.123 48.234,41.123 C1A.2 J1.3@64.59,41.14
LPF_IN: J2.4 R1D.2 | length 3.3
  Top Layer w0.3: J2.4 R1D.2
LPF_OUT: C1D.1 J2.2 R1D.1 | length 7.5
  Top Layer w0.3: J2.2 C1D.1 R1D.1
MISO_PD: ADC.5 P2.40 | length 4.9
  Top Layer w0.3: P2.40 8.95,4.317 8.95,7.908 9.126,8.083 ADC.5
MODE: R9C.2 U1C.6 | length 3.8
  Top Layer w0.25: U1C.6 R9C.2@52.589,20.06
  Top Layer w0.3: R9C.2@52.589,20.06 R9C.2@52.63,20.1
MOSI_PD: ADC.4 P2.42 | length 8.4
  Top Layer w0.3: P2.42 6.409,4.316 6.409,8.858 6.585,9.033 ADC.4
NetC1A_1: C1A.1 Q2A.3 R1A.2 R2A.1 R9A.1 U1A.4 | length 17.3
  Top Layer w0.3: U1A.4 42.585,38.715 43.378,39.507 R1A.2 ; Q2A.3@46.361,35.286 R1A.2 ; R9A.1 53.521,37.908 48.254,37.908 48.25,37.912 C1A.1 48.234,39.523 46.377,39.523 R1A.2
NetC1B_2: C1B.2 C2B.1 R1B.1 | length 6.3
  Top Layer w0.3: C1B.2 R1B.1 C2B.1
NetC5C_2: C5C.2 R1C.1 R2C.1 R3C.2 | length 17.6
  Top Layer w0.3: R3C.2 18.454,11.402 19.14,12.087 21.146,12.087 21.96,12.902 R1C.1
NetC6C_1: C6C.1 R7C.1 | length 1.8
  Top Layer w0.3: C6C.1 R7C.1
NetC6C_2: C6C.2 U1C.4 | length 2.6
  Top Layer w0.25: U1C.4 56.292,15.749 C6C.2
NetC7C_2: C7C.2 R10C.2 R11C.3 | length 4.4
  Top Layer w0.3: R10C.2 C7C.2 R11C.3
NetC9_2: C9.2 U5.4 | length 1.6
  Top Layer w0.3: U5.4 28.255,41.897 C9.2
NetC10A_1: C10A.1 PD.2 R4A.2 | length 9.9
  Top Layer w0.3: C10A.1@38.455,29.353 38.455,27.54 R4A.2 42.792,27.589 42.804,27.577 46.495,27.577 PD.2
NetC10A_2: C10A.2 R4A.1 U2A.1 U2A.4 | length 8.2
  Top Layer w0.3: U2A.4 34.3,34.109 36.2,32.209 U2A.1 C10A.2@36.85,29.528 ; R4A.1@36.855,27.396 C10A.2@36.855,29.353
NetC11_1: C11.1 U2.2 | length 4.8
  Top Layer w0.3: C11.1 5.409,44.432 U2.2
NetC11_2: C11.2 U2.4 | length 6.5
  Top Layer w0.3: C11.2 5.488,40.111 9.999,40.111 10.175,40.287 U2.4
NetC11A_2: C11A.2 R5A.2 U1A.3 | length 12.1
  Top Layer w0.3: R5A.2 v2(36,42.842) ; v2(36,42.842) C11A.2 ; C11A.2 42.409,42.842 42.585,42.666 U1A.3
NetC14A_2: C14A.2 C15A.2 R6A.2 U3A.4 | length 11.9
  Top Layer w0.3: C15A.2 60.108,29.064 ; R6A.2@60.108,23.703 60.108,23.708 60.108,27.505 60.108,29.064 U3A.4
NetC15A_1: C15A.1 R8A.2 U3A.1 | length 4.2
  Top Layer w0.3: C15A.1 R8A.2 U3A.1@57.445,32.564
NetC16A_1: C16A.1 R7A.2 U3A.3 | length 12
  Top Layer w0.3: U3A.3@57.445,30.664 58.618,30.664 58.794,30.84 R7A.2@58.794,39.541 ; R7A.2 60.699,39.545 C16A.1
NetJ10_3: J10.3 R11C.2 | length 5.8
  Top Layer w0.3: R11C.2 35.02,17.292 40.827,17.292 J10.3
NetPD_1: PD.1 Q2A.2 R3A.2 R10A.2 U2A.3 | length 18.6
  Top Layer w0.3: U2A.3@36.85,34.106 44.357,34.106 Q2A.2 44.352,34.101 R3A.2 44.352,32.153 46.4,30.105 PD.1
  Bottom Layer w0.3: PD.1 v1(52.589,30.105)
NetQ1A_2: Q1A.2 R2A.2 | length 1.6
  Top Layer w0.3: R2A.2 48.264,36.29 Q1A.2
NetR3C_1: R3C.1 R4C.1 U2C.3 | length 15.8
  Top Layer w0.3: R3C.1@19.878,7.324 R3C.1 31.41,7.5 31.585,7.676 U2C.3 33.612,9.537 R4C.1 ; R4C.1@33.655,9.666 R4C.1@33.662,9.673
NetR5C_1: R5C.1 R6C.2 U2C.4 | length 6.5
  Top Layer w0.3: R6C.2 30.652,10.955 U2C.4@31.435,11.737 ; U2C.4@31.435,11.737 31.585,11.887 U2C.4 33.636,12.137 R5C.1
NetR11C_1: R11C.1 R12C.2 | length 2.7
  Top Layer w0.3: R11C.1 39.224,19.817 R12C.2
OFSN: C9C.2 U1C.14 | length 2.7
  Top Layer w0.25: C9C.2 52.089,10.946 U1C.14
  Top Layer w0.3: C9C.2@52.077,10.934 C9C.2
OUT_N: DIFF.1 R5C.2 U1C.10 | length 19.6
  Top Layer w0.25: R5C.2 35.307,12.119 35.307,11.272 35.453,11.125 36.437,11.125 36.463,11.099 37.01,11.099 37.174,11.262 37.174,11.613 DIFF.1 38.184,11.613 38.184,11.262 38.348,11.099 39.002,11.099 42.859,14.956 43.152,15.249 U1C.10
OUT_P: DIFF.2 R4C.2 U1C.11 | length 19.9
  Top Layer w0.25: R4C.2 35.307,9.632 35.307,10.479 35.453,10.625 36.23,10.625 36.256,10.599 37.245,10.599 37.421,10.422 37.421,9.837 DIFF.2 37.938,9.837 37.938,10.422 38.114,10.599 39.209,10.599 43.359,14.749 U1C.11
PS_ON: P2.44
VAGC: R13C.2 U1C.13 | length 5.2
  Top Layer w0.25: R13C.2 49.943,11 51.589,12.646 U1C.13
VCC: +5V.2 C1.1 C2.1 C3.2 J0.1 U3.3 | length 23.7
  Top Layer w0.3: U3.3@7.629,30.991 U3.3@7.65,30.971
  Top Layer w0.5: U3.3 7.632,25.256 C2.1 14.034,25.187 14.04,25.193 ; J0.1 14.04,25.193 ; +5V.2 14.04,25.193
VREF: C9C.1 R10C.1 R13C.3 U1C.16 | length 32.8
  Top Layer w0.25: U1C.16 53.089,13.373 53.682,12.78 C9C.1
  Top Layer w0.3: R13C.3 53.506,8.46 53.682,8.636 C9C.1
  Bottom Layer w0.3: v1(30.5,15.8) 40.321,15.8 45.535,10.586 R13C.3
pads on no net: P1.23 P1.24 P1.25 P1.26 P1.27 P1.28 P1.29 P1.30 P1.31 P1.32 P1.33 P1.34 P1.35 P1.36 P1.37 P1.38 P1.39 P1.40 P1.41 P1.42 P1.43 P1.44 P1.45 P1.46 P2.27 P2.28 P2.29 P2.30 P2.31 P2.32 P2.33 P2.34 P2.35 P2.36 P2.38 P2.39 P2.41 P2.43 P2.45 P2.46 U1C.2 U1C.3 U1C.9 U1C.12 U2.7 U4.4

## Polygon pours and split planes (outlines as drawn)
GND on Bottom Layer "GND_L02_P013" (solid, pour order 13): 0.5,0.5 0.5,54.1 84.5,54.1 84.5,0.5
GND on Top Layer "GND_L01_P014" (solid, pour order 14): 0.5,0.5 0.5,54.1 84.5,54.1 84.5,0.5

## Other copper
Multi-Layer:
  pour cut-out: 45.403,34.756 45.403,26.305 35.475,26.305 35.475,34.756
  pour cut-out: 49.627,42.095 49.627,36.887 41.733,36.887 41.733,42.095
  pour cut-out: 47.777,36.887 47.777,26.305 45.403,26.305 45.403,36.887

## Silkscreen, mask and mechanical layers (free items; w line width, h text height)
Top Overlay:
  text "OpenVLC_RX_2.4_B" at 58.531,50.944 h0.8
  text "IMDEA Networks" at 58.531,49.512 h0.8
  text "-2.5V" at 27.06,46.392 h0.5
  text "LNA_OUT" at 62.386,42.919 h0.5
  text "HPF_IN" at 66.16,42.919 h0.5
  text "TRIMMER" at 35.055,41.543 h0.3
  text "VBIAS" at 35.355,41.075 h0.3
  text "-5V" at 14.921,40.791 h0.5
  text "GAIN_IN" at 62.386,36.419 h0.5
  text "HPF_OUT" at 66.16,36.419 h0.5
  text "+5V" at 7.433,35.83 h0.5
  text "+2.5V" at 28.142,35.828 h0.5
  text "K" at 50.081,29.753 h0.5
  text "A" at 50.08,27.295 h0.5
  text "V_COM_MODE" at 24.436,25.405 h0.5
  text "GAIN_ADJ" at 34.661,23.766 h0.5
  text "GAIN_MODE" at 39.2,19.058 h0.5
  text "AGC_MODE" at 43.8,19.058 h0.5
  text "LPF_OUT" at 15.248,15.165 h0.5
  text "LPF_IN" at 18.993,15.165 h0.5
  text "ADC_IN" at 15.461,8.65 h0.5
  text "GAIN_OUT" at 18.7,8.65 h0.5
  text "AGC_SET" at 45.588,6.841 h0.5
  text "GND" at 30.634,4.953 h0.5 r270
Bottom Overlay:
  text "GND" at 12.21,32.4 h0.5 r270
Mechanical 1:
  the board outline again, w0.254

## Text inside footprints (layer, text, board x,y; h text height)
C2: Top Overlay "+" at 9.486,24.673 h1.2
C11: Top Overlay "+" at 5.9,46.194 h1.2 r90
C12: Top Overlay "+" at 20.731,48.078 h1.2 r90